# Allegro board FPMemory_I2C.brd
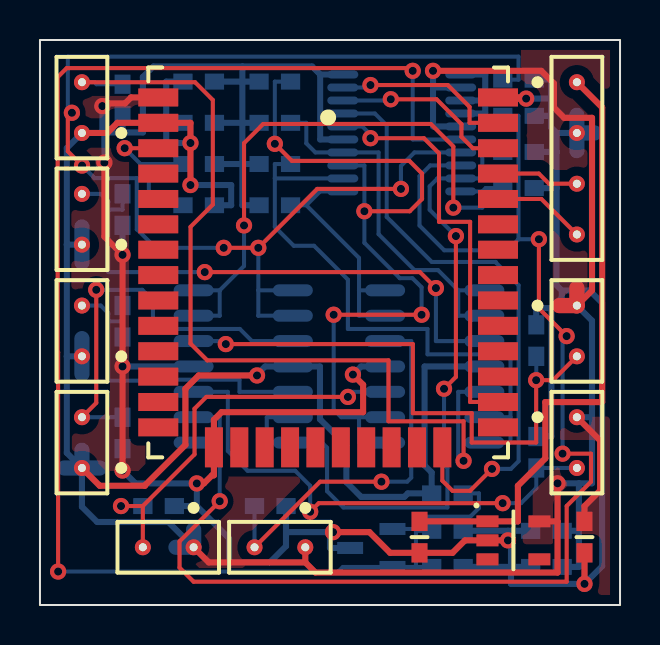
[diagram p0: board, top side]
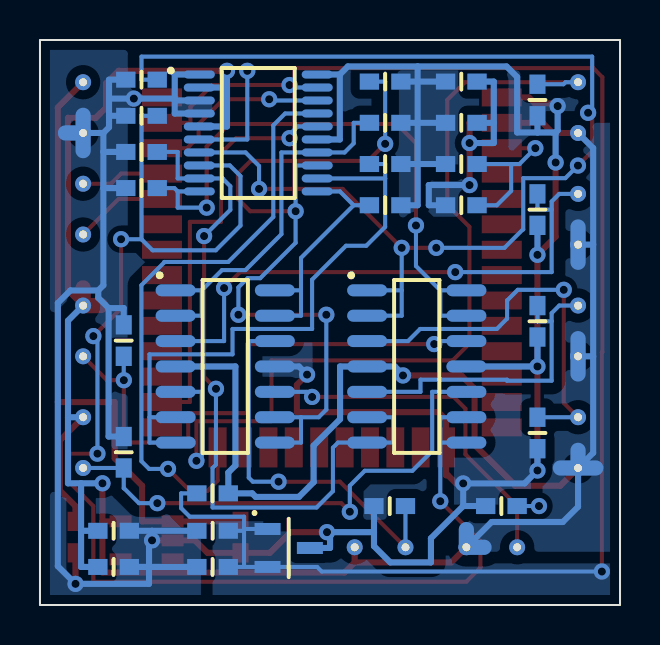
[diagram p1: board, bottom side, seen from below]

Outline 29.02 x 28.28 mm; copper layers: TOP, BOTTOM. Coordinates in mm from the lower left corner of the outline.
Outline path: rectangle 0,0 29.02,28.28

## Design rules (mm)
constraint set DEFAULT: min track width 0.203

## Placement (name value [footprint] x y rotation side)
C1  10uF  [CAP0603]  7.94 24.13 180 bottom
C2  0.1uF  [CAP0603]  7.94 22.07 180 bottom
C3  0.1uF  [CAP0603]  7.94 26.19 180 bottom
C4  0.1uF  [CAP0603]  23.94 26.29 180 bottom
C5  0.1uF  [CAP0603]  23.94 24.48 180 bottom
C6  0.1uF  [CAP0603]  25.34 1.91 180 bottom
C7  0.1uF  [CAP0603]  23.94 22.67 0 bottom
C8  0.1uF  [CAP0603]  23.94 20.87 0 bottom
C9  0.1uF  [CAP0603]  11.75 26.19 0 bottom
C10  0.1uF  [CAP0603]  11.75 24.13 0 bottom
C11  1uF  [CAP0603]  20.39 3.71 0 bottom
C12  0.1uF  [CAP0603]  20.39 1.91 0 bottom
C13  0.1uF  [CAP0603]  25.34 3.71 180 bottom
C14  0.1uF  [CAP0603]  11.75 22.07 180 bottom
C15  0.1uF  [CAP0603]  11.75 20.01 180 bottom
C16  1uF  [CAP0603]  18.99 3.4 270 top
C17  2.2uF  [CAP0603]  27.25 3.4 270 top
NOREF  -  []  29.02 0 90 top
NOREF#2  -  []  0 0 0 top
R1  10k  [RES0603]  7.94 20.01 0 bottom
R2  50k  [RES0603]  4.13 8.61 270 bottom
R3  50k  [RES0603]  24.83 7.65 90 bottom
R4  50k  [RES0603]  4.13 14.2 90 bottom
R5  50k  [RES0603]  24.83 13.23 90 bottom
R6  50k  [RES0603]  4.13 19.79 270 bottom
R7  50k  [RES0603]  5.94 4.95 0 bottom
R8  50k  [RES0603]  4.13 25.27 90 bottom
R9  50k  [RES0603]  11.52 4.95 0 bottom
R10  500  [RES0603]  20.39 5.59 180 bottom
S1  IMS-C20B  [SIP-2N]  2.1 6.86 270 top
S2  IMS-C20B  [SIP-2N]  26.87 9.4 90 top
S3  IMS-C20B  [SIP-2N]  2.1 12.45 270 top
S4  IMS-C20B  [SIP-2N]  26.87 14.99 90 top
S5  IMS-C20B  [SIP-2N]  2.1 18.03 270 top
S6  IMS-C20B  [SIP-2N]  7.69 2.89 0 top
S7  IMS-C20B  [SIP-2N]  2.1 23.62 270 top
S8  IMS-C20B  [SIP-2N]  13.28 2.89 0 top
U1  AD8608  [SOP127-14N]  10.17 11.94 180 bottom
U2  ESP32  [SMP-48N]  14.42 17.14 0 top
U3  UART  [SIP-4N]  26.87 26.16 90 top
U4  AD7998  [SOP65-20N]  18.1 23.62 180 bottom
U5  AD8608  [SOP127-14N]  19.75 11.94 180 bottom
U6  TPS70933  [SOT23-5N]  23.69 3.24 0 top
U7  TL431  [SOT23]  16.58 2.86 180 bottom

## Library data of the parts
C1-C17 = CAP NP
R1-R10 = R
S1-S8 = IMS-C20B
U1 U5 = AD8608
U2 = ESP32
U3 = UART
U4 = AD7998
U6 = TPS70933
U7 = TL431_0

## Footprints (pads in the part's own frame, mm; a bottom-side part is the same pattern mirrored in y, then rotated)
CAP0603
  rect 0.965x0.8 smd: 1(-0.787,0) 2(0.787,0)
RES0603
  rect 0.965x0.8 smd: 1(-0.787,0) 2(0.787,0)
SIP-2N
  round 0.8 hole 0.4: 1(0,0) 2(-2.54,0)
SIP-4N
  round 0.8 hole 0.4: 1(0,0) 2(-2.54,0) 3(-5.08,0) 4(-7.62,0)
SMP-48N
  rect 2x0.9 smd: 1(-8.5,8.255) 2(-8.5,6.985) 3(-8.5,5.715) 4(-8.5,4.445) 5(-8.5,3.175) 6(-8.5,1.905) 7(-8.5,0.635) 8(-8.5,-0.635) 9(-8.5,-1.905) 10(-8.5,-3.175) 11(-8.5,-4.445) 12(-8.5,-5.715) 13(-8.5,-6.985) 14(-8.5,-8.255) 25(8.5,-8.255) 26(8.5,-6.985) 27(8.5,-5.715) 28(8.5,-4.445) 29(8.5,-3.175) 30(8.5,-1.905) 31(8.5,-0.635) 32(8.5,0.635) 33(8.5,1.905) 34(8.5,3.175) 35(8.5,4.445) 36(8.5,5.715) 37(8.5,6.985) 38(8.5,8.255)
  rect 0.9x2 smd: 15(-5.715,-9.255) 16(-4.445,-9.255) 17(-3.175,-9.255) 18(-1.905,-9.255) 19(-0.635,-9.255) 20(0.635,-9.255) 21(1.905,-9.255) 22(3.175,-9.255) 23(4.445,-9.255) 24(5.715,-9.255)
SOP65-20N
  oval 1.55x0.4 smd: 1(-2.95,2.925) 2(-2.95,2.275) 3(-2.95,1.625) 4(-2.95,0.975) 5(-2.95,0.325) 6(-2.95,-0.325) 7(-2.95,-0.975) 8(-2.95,-1.625) 9(-2.95,-2.275) 10(-2.95,-2.925) 11(2.95,-2.925) 12(2.95,-2.275) 13(2.95,-1.625) 14(2.95,-0.975) 15(2.95,-0.325) 16(2.95,0.325) 17(2.95,0.975) 18(2.95,1.625) 19(2.95,2.275) 20(2.95,2.925)
SOP127-14N
  oval 2x0.6 smd: 1(-2.483,3.81) 2(-2.483,2.54) 3(-2.483,1.27) 4(-2.483,0) 5(-2.483,-1.27) 6(-2.483,-2.54) 7(-2.483,-3.81) 8(2.483,-3.81) 9(2.483,-2.54) 10(2.483,-1.27) 11(2.483,0) 12(2.483,1.27) 13(2.483,2.54) 14(2.483,3.81)
SOT23
  rect 1.3x0.6 smd: 1(-1.06,0.95) 2(-1.06,-0.95) 3(1.06,0)
SOT23-5N
  rect 1.1x0.6 smd: 1(-1.3,0.95) 2(-1.3,0) 3(-1.3,-0.95) 4(1.3,-0.95) 5(1.3,0.95)

## Nets
GND: C1.1 C2.1 C3.1 C4.1 C5.1 C6.2 C7.2 C8.2 C9.1 C10.1 C11.2 C12.2 C13.2 C14.2 C15.2 C16.2 C17.2 R2.2 R3.2 R4.1 R5.2 R6.2 R7.2 R8.1 R9.2 U1.11(V-) U2.1 U2.15 U2.38 U3.2 U4.1 U4.3 U4.4 U4.15 U4.20 U5.11(V-) U6.2 U7.3
VCC: C16.1 U3.1 U6.1
VDD33: C1.2 C3.2 C6.1 C13.1 C17.1 R1.2 R10.2 S1.1 S2.1 S3.1 S4.1 S5.1 S6.1 S7.1 S8.1 U1.4 U2.2 U4.2 U4.5 U5.4 U6.5(OUT)
CH1: C4.2 U1.1 U1.2 U4.7
CH2: C10.2 U4.14 U5.1 U5.2
CH3: C5.2 U1.8 U1.9 U4.8
CH4: C9.2 U4.13 U5.8 U5.9
CH5: C7.1 U1.6 U1.7 U4.9
CH6: C14.1 U4.12 U5.6 U5.7
CH7: C8.1 U1.13 U1.14 U4.10
CH8: C15.1 U4.11(VIN8) U5.13 U5.14
GPIO2: U2.24 U4.17
GPIO4: U2.26 U4.16
IO0: U2.25
RXD: U2.35(TXD0) U3.3
SCL: U2.37 U4.19
SDA: U2.36 U4.18
TXD: U2.34 U3.4(TXD)
VREF: C11.1 C12.1 R10.1 U4.6 U7.1 U7.2(REF)
N94929: R2.1 S1.2(-) U1.3
N94969: R3.1 S2.2(-) U1.10
N95071: C2.2 R1.1 U2.3
N95303: R4.2 S3.2(-) U1.5
N95319: R5.1 S4.2(-) U1.12
N95969: R6.1 S5.2(-) U5.3
N96009: R7.1 S6.2(-) U5.10
N96297: R8.2 S7.2(-) U5.5
N96313: R9.1 S8.2(-) U5.12

Pads without a net: U2 4 5 6 7 8 9 10 11 12 13 14 16 17 18 19 20 21 22 23 27 28 29 30 31 32 33; U6 3 4

## Via types
v1: diameter 0.813, hole 0.406, TOP to BOTTOM, 51 vias

## Routing (per net, layer and track width the routed paths; a pad name or vN(x,y) marks a point on that pad's centre or on a via; arc(x,y) is an arc through that point)
GND: length 177.9
  TOP w0.305: C17.2 v1(27.25,1.06) ; v1(3.22,22.14) 3.22,18.43 v1(4.13,17.52) v1(4.13,11.94) v1(4.13,6.73) ; U2.38 23.92,25.4 23.98,25.34 v1(24.33,25.34) ; v1(14.66,3.65) 16.49,3.65 17.52,2.61 C16.2 20.64,2.61 21.27,3.24 U6.2 v1(23.42,3.24) ; v1(7.85,6.09) 8.2,6.09 8.61,6.49 8.7,6.49 U2.15 8.7,9.27 9.09,9.65 16.17,9.65 16.17,11.02 v1(15.66,11.53) ; U2.1 4.56,25.4 4.26,25.1 3.26,25.1 v1(3.12,24.97)
  BOTTOM w0.305: 25.57,25.34 25.57,26.29 C4.1 ; 25.57,25.34 25.57,24.48 ; 25.57,25.34 v1(24.33,25.34) 22.28,25.34 ; C13.2 23.42,3.71 ; 23.42,3.71 C11.2 ; 23.42,3.71 v1(23.42,3.24) 23.57,3.08 23.57,1.91 ; 26.11,15.74 25.85,16 25.85,20.87 ; 26.11,15.74 26.11,15.38 25.59,14.86 ; 26.11,15.74 27.5,15.74 28.13,15.11 28.13,1.94 v1(27.25,1.06) 23.57,1.06 23.57,1.91 ; 14.02,26.55 13.62,26.95 10.13,26.95 ; 14.02,26.55 U4.20 ; 14.02,26.55 14.02,23.3 U4.15 ; C12.2 23.57,1.91 ; 23.57,1.91 C6.2 ; 4.13,23.65 3.22,23.65 ; 4.13,23.65 R8.1 ; 4.13,23.65 5.15,23.65 5.15,26.42 5.68,26.95 10.13,26.95 ; 3.22,23.65 3.12,23.75 v1(3.12,24.97) ; 3.22,23.65 v1(3.22,22.14) ; R7.2 7.85,4.95 ; 7.85,4.95 9.46,3.34 9.46,2.13 11.5,2.13 12.31,2.95 12.31,3.65 ; 7.85,4.95 v1(7.85,6.09) 4.78,6.09 v1(4.13,6.73) R2.2 ; U4.1 22.28,26.55 22.28,25.34 ; 25.85,23.62 25.57,23.9 25.57,24.48 ; 25.85,23.62 25.85,22.67 ; 25.85,23.62 U3.2 ; R6.2 v1(4.13,17.52) ; C7.2 25.85,22.67 ; 25.85,22.67 25.85,20.87 ; R5.2 24.83,14.86 25.59,14.86 ; 10.13,26.19 10.13,24.13 ; 10.13,26.19 10.13,26.95 ; 10.13,26.19 C9.1 ; 10.13,26.19 C3.1 ; 10.13,24.13 C10.1 ; 10.13,24.13 10.13,22.07 ; 10.13,24.13 C1.1 ; U4.4 22.28,24.6 22.28,25.25 ; 10.13,22.07 C14.2 ; 10.13,22.07 10.13,20.01 C15.2 ; 10.13,22.07 C2.1 ; R3.2 25.59,8.43 25.59,14.86 ; 25.57,24.48 C5.1 ; 12.31,3.65 v1(14.66,3.65) 14.51,3.5 14.51,2.86 U7.3 ; 12.31,3.65 R9.2 ; U1.11 v1(4.13,11.94) R4.1 ; 22.28,25.25 U4.3 ; 22.28,25.25 22.28,25.34 ; v1(15.66,11.53) 16.06,11.94 U5.11 ; 25.85,20.87 C8.2
  BOTTOM w0.762: U3.2 27.75,23.62 ; U3.2 26.87,24.51 ; U3.2 26.87,22.74
VCC: length 30.8
  TOP w0.305: U3.1 28.13,24.9 28.13,10.15 25.29,10.15 25.29,7.34 23.91,5.97 23.91,4.19 U6.1 C16.1
VDD33: length 165.8
  TOP w0.305: v1(25.9,6.09) 25.9,4.19 ; 25.9,4.19 U6.5 ; 25.9,4.19 25.9,1.63 13.78,1.63 13.28,2.13 ; v1(10.86,11.49) 7.94,11.49 7.28,10.82 7.28,8.01 5.24,5.98 5.24,5.97 2.99,5.97 S1.1 ; C17.1 27.25,4.95 28.01,5.71 28.03,5.71 28.03,8.23 S2.1 ; 13.28,2.13 8.44,2.13 S6.1 ; 13.28,2.13 S8.1 ; S7.1 3.36,23.62 3.87,24.13 U2.2 7.53,24.13 v1(7.53,23.12) v1(7.53,21.02) ; v1(19.67,26.73) 25.09,26.73 25.72,26.1 25.72,24.89 26.23,24.38 27.62,24.38 27.62,15.74 S4.1
  TOP w0.762: 26.87,15.87 S4.1 25.98,14.99
  BOTTOM w0.305: 26.97,3.71 26.97,1.91 C6.1 ; 26.97,3.71 C13.1 ; 26.97,3.71 26.97,6.09 ; 27.62,9.4 S2.1 ; 27.62,9.4 27.62,6.09 26.97,6.09 ; 27.62,9.4 27.62,14.23 S4.1 ; 26.97,6.09 v1(25.9,6.09) ; U4.5 19.67,23.95 19.67,25.9 ; v1(7.53,21.02) 9.57,21.02 9.57,20.01 R1.2 ; U5.4 19.25,11.94 19.25,6.98 19.6,6.63 R10.2 18.41,5.59 18.23,5.41 16.07,5.41 15.33,6.15 15.33,7.98 14.01,9.3 14.01,11.94 U1.4 11.27,11.94 10.86,11.53 v1(10.86,11.49) ; 1.34,18.03 1.34,22.87 S7.1 ; 1.34,18.03 1.34,12.45 ; 1.34,18.03 S5.1 ; 19.67,25.9 v1(19.67,26.73) ; 19.67,25.9 U4.2 ; S6.1 6.42,4.16 2.86,4.16 2.1,4.92 S1.1 1.34,7.61 1.34,12.45 ; 6.32,24.13 6.32,26.19 C3.2 ; 6.32,24.13 6.32,23.12 v1(7.53,23.12) ; 6.32,24.13 C1.2 ; 1.34,12.45 S3.1
  BOTTOM w0.762: 2.1,13.33 S3.1 2.1,11.56 ; 7.69,3.77 S6.1 6.8,2.89 ; 1.22,6.86 S1.1 ; S1.1 2.1,7.74 ; S1.1 2.98,6.86 ; 2.1,17.15 S5.1 2.1,18.92
CH1: length 62.1
  TOP w0.203: v1(1.6,24.63) 1.39,24.43 1.39,22.7 v1(2.11,21.99) ; v1(18.06,20.82) 13.87,20.82 v1(10.92,17.87) v1(9.19,17.87)
  BOTTOM w0.203: v1(9.19,17.87) 5.78,17.87 4.86,18.8 4.84,18.8 4.84,21.36 2.74,21.36 v1(2.11,21.99) ; 10.92,15.75 v1(10.92,17.87) ; 10.92,15.75 10.92,14.48 U1.2 ; 10.92,15.75 U1.1 ; C4.2 23.94,26.29 23.94,27.44 1.39,27.44 1.39,24.84 v1(1.6,24.63) ; v1(18.06,20.82) 18.06,21.97 18.74,22.65 U4.7
CH2: length 18.7
  BOTTOM w0.203: 20.93,15.75 20.93,14.48 U5.2 ; 20.93,15.75 19.92,16.76 18.74,16.76 16.94,18.56 16.94,22.65 U4.14 13.78,22.65 13.33,23.1 13.33,24.13 C10.2 ; 20.93,15.75 U5.1
CH3: length 68.8
  TOP w0.203: v1(26.35,13.46) 24.97,14.84 v1(24.97,18.31) ; v1(26.15,7.57) 27.57,7.57 27.57,6.17 26.35,4.95 26.35,1.17 7.69,1.17 6.98,1.87 6.98,3.18 v1(8.99,5.19)
  BOTTOM w0.203: U4.8 19.52,22 18.99,21.46 18.99,18.99 20.23,17.75 23.39,17.75 23.94,18.3 23.94,18.31 ; 23.94,18.31 23.94,24.48 C5.2 ; 23.94,18.31 v1(24.97,18.31) ; 8.99,8.13 v1(8.99,5.19) ; 8.99,8.13 8.99,9.4 U1.9 ; 8.99,8.13 U1.8 ; v1(26.35,13.46) 26.15,13.25 v1(26.15,7.57)
CH4: length 40.9
  TOP w0.203: v1(11.75,23.08) 12.61,22.22 18.48,22.22 19.12,21.59 19.12,20.32 18.5,19.71 v1(16.23,19.71) ; v1(19.1,14.53) v1(14.7,14.53)
  BOTTOM w0.203: v1(14.7,14.53) 14.7,9.78 15.08,9.4 15.96,9.4 ; C9.2 11.75,26.19 v1(11.75,23.08) ; U5.9 15.96,9.4 ; 15.96,9.4 15.96,8.13 U5.8 ; U4.13 16.23,22 v1(16.23,19.71) 16.23,18.13 18,16.36 18.64,16.36 19.1,15.9 v1(19.1,14.53)
CH5: length 36.3
  TOP w0.203: v1(20.81,18.46) 20.81,11.41 v1(20.22,10.82)
  BOTTOM w0.203: U1.6 11.35,9.4 11.35,8.13 U1.7 14.11,8.13 14.37,7.87 14.37,5.7 15.18,4.88 20.39,4.88 20.39,6.86 20.22,7.03 v1(20.22,10.82) ; v1(20.81,18.46) 19.5,19.78 19.5,20.96 19.88,21.34 19.88,21.35 U4.9 22.13,21.35 22.13,22.67 C7.1
CH6: length 31
  BOTTOM w0.203: 23.54,9.4 23.54,12.55 19.39,12.55 19.39,13.82 15.41,13.82 15.41,16.28 13.71,17.98 12.7,17.98 11.75,18.92 11.75,21.35 ; 23.54,9.4 U5.6 ; 23.54,9.4 23.54,8.13 U5.7 ; C14.1 11.75,22.07 11.75,21.35 ; 11.75,21.35 U4.12
CH7: length 30.6
  TOP w0.203: v1(20.68,19.89) 20.68,22.95 19.56,24.07 11.17,24.07 10.21,23.11 v1(10.21,18.99)
  BOTTOM w0.203: v1(10.21,18.99) 10.21,16.96 8.99,15.75 ; U4.10 22.13,20.7 ; 22.13,20.7 22.3,20.87 C8.1 ; 22.13,20.7 22.13,19.89 v1(20.68,19.89) ; U1.13 8.99,14.48 8.99,15.75 ; 8.99,15.75 U1.14
CH8: length 12.1
  BOTTOM w0.203: 13.33,20.01 14.02,20.7 U4.11 ; 13.33,20.01 15.96,17.37 15.96,15.75 ; 13.33,20.01 C15.1 ; U5.14 15.96,15.75 ; 15.96,15.75 15.96,14.48 U5.13
GPIO2: length 30.2
  TOP w0.203: U2.24 20.13,6.22 20.64,5.71 21.52,5.71 v1(22.62,6.81)
  BOTTOM w0.203: v1(22.62,6.81) 23.56,6.81 23.95,7.2 23.95,16 22.8,17.15 22.8,17.17 19.6,17.17 17.35,19.42 17.35,24 16.76,24.6 U4.17
GPIO4: length 20.9
  TOP w0.203: U2.26 21.52,10.16 21.52,19.17 19.97,19.17 19.97,22.61 19.21,23.36 v1(16.54,23.36)
  BOTTOM w0.203: v1(16.54,23.36) 16.54,23.54 16.13,23.95 U4.16
RXD: length 4.2
  TOP w0.203: U2.35 24.96,21.59 25.47,21.08 U3.3
SCL: length 9.1
  TOP w0.203: v1(16.54,26.02) 20.4,26.02 21.5,24.93 21.5,24.13 U2.37
  BOTTOM w0.203: v1(16.54,26.02) 16.41,25.9 U4.19
SDA: length 9.2
  TOP w0.203: U2.36 21.66,22.86 21.09,23.43 21.09,24.06 19.84,25.31 v1(17.55,25.31)
  BOTTOM w0.203: v1(17.55,25.31) 17.49,25.25 U4.18
TXD: length 4.7
  TOP w0.203: U3.4 25.09,20.32 U2.34
VREF: length 76.7
  TOP w0.203: v1(0.91,1.68) 0.91,12.65 0.89,12.65 0.89,26.42 1.34,26.87 18.51,26.87 v1(18.65,26.73)
  BOTTOM w0.203: 18.81,3.81 18.81,4.42 21.53,4.42 21.96,4.85 21.96,5.59 R10.1 ; 18.81,3.81 U7.1 ; 18.81,3.81 18.81,3.71 ; 18.81,1.91 U7.2 15.16,1.91 14.93,1.68 v1(0.91,1.68) ; 18.81,1.91 18.81,3.71 ; 18.81,1.91 C12.1 ; C11.1 18.81,3.71 ; v1(18.65,26.73) 18.65,23.3 U4.6
N94929: length 20.1
  TOP w0.203: v1(2.82,15.77) 2.82,10.11 S1.2
  BOTTOM w0.203: U1.3 10.61,13.21 10,13.82 6.16,13.82 5.65,14.33 5.65,15.24 5.12,15.77 v1(2.82,15.77) ; R2.1 S1.2
N94969: length 25.7
  TOP w0.203: v1(13.52,4.67) 13.95,5.1 v1(23.15,5.1)
  BOTTOM w0.203: S2.2 R3.1 24.83,5.84 24.82,5.84 24.07,5.1 v1(23.15,5.1) ; v1(13.52,4.67) 13.52,5.97 12.77,6.72 10.39,6.72 9.4,7.71 9.4,10.67 U1.10
N95071: length 8.3
  TOP w0.203: U2.3 v1(4.24,22.86)
  BOTTOM w0.203: R1.1 6.16,20.01 5.45,20.72 5.45,22.07 ; 5.45,22.07 5.03,22.07 v1(4.24,22.86) ; 5.45,22.07 C2.2
N95303: length 16.2
  BOTTOM w0.203: 3.42,14.2 3.42,14.61 3.04,14.99 S3.2 ; 3.42,14.2 4.13,14.2 R4.2 ; 3.42,14.2 3.42,11.23 5.66,11.23 5.66,11.28 9.98,11.28 9.98,10.67 U1.5
N95319: length 29
  TOP w0.203: S4.2 25.67,11.25 v1(24.83,11.25) 24.83,8.13 21.6,8.13 21.6,9.6 18.66,9.6 18.66,13.06 v1(9.3,13.06)
  BOTTOM w0.203: R5.1 24.83,11.26 v1(24.83,11.25) ; v1(9.3,13.06) 9.15,13.21 U1.12
N95969: length 28.3
  TOP w0.203: v1(8.24,16.66) 19.01,16.66 v1(19.81,15.86)
  BOTTOM w0.203: v1(19.81,15.86) 19.81,13.21 U5.3 ; 3.42,19.79 3.42,16.66 v1(8.24,16.66) ; 3.42,19.79 3.42,20.19 3.04,20.57 S5.2 ; 3.42,19.79 4.13,19.79 R6.1
N96009: length 20.1
  TOP w0.203: R7.1 S6.2 ; R7.1 v1(4.06,4.95) ; R7.1 7.73,7.54 7.73,9.82 8.32,10.41 v1(15.41,10.41)
  BOTTOM w0.203: U5.10 15.66,10.67 v1(15.41,10.41) ; R7.1 v1(4.06,4.95)
N96297: length 45.5
  TOP w0.203: v1(21.2,7.22) 21.2,9.19 17.44,9.19 17.44,12.24 8.37,12.24 7.53,13.08 7.53,18.92 8.65,20.04 8.65,25.27 7.76,26.16 S7.2
  BOTTOM w0.203: U5.5 20.93,10.67 20.93,7.48 v1(21.2,7.22) ; R8.2 2.83,26.06 2.73,26.16 S7.2
N96313: length 19.5
  TOP w0.203: v1(17.09,6.17) 14.02,6.17 S8.2
  BOTTOM w0.203: R9.1 S8.2 ; v1(17.09,6.17) 18.37,6.17 18.58,6.38 18.58,13.21 U5.12

## Copper pours and planes (outline as drawn; the poured copper is in the pictures)
GND on TOP: 0.5,27.78 5.28,27.78 5.28,0.5 0.5,0.5 ; 3 cut-outs
GND on BOTTOM: 0.5,27.78 28.52,27.78 28.52,0.5 0.5,0.5 ; 10 cut-outs
VDD33 on TOP: 24.07,27.78 28.52,27.78 28.52,0.5 4.26,0.5 4.26,7.11 24.07,7.11 ; 6 cut-outs
VDD33 on BOTTOM: 0.5,24.13 3.88,24.13 3.88,4.45 7.82,4.45 7.82,2.67 0.5,2.67
VDD33 on BOTTOM: 7.31,21.46 7.31,19.43 9.34,19.43 9.72,19.81 9.72,21.46
VREF on BOTTOM: 17.85,4.19 20.39,4.19 20.39,0.5 0.5,0.5 0.5,3.68 17.85,3.68

## Text on the board
DEVICE_TYPE_TOP: FIGURE | FINISHED_SIZE | 15.75 | 16.0 | DRILL CHART: TOP to BOTTOM | ALL UNITS ARE IN MILS | PLATED | QTY | 20 | 51
